# Altium PCB PCB1.PcbDoc (part 7 of 7)
Units mm, origin at the board's own origin, x right, y up, seen from the top; angles counter-clockwise.
Board outline 100 x 70 mm, 6 copper layers (Top Layer 1, GND_1, SIG, VCC, GND_2, Bottom Layer 1), stack 0.816 mm thick; 462 components, 328 nets, 2208 pads, 873 vias.
Unrouted connection lines stored in the file: 175.
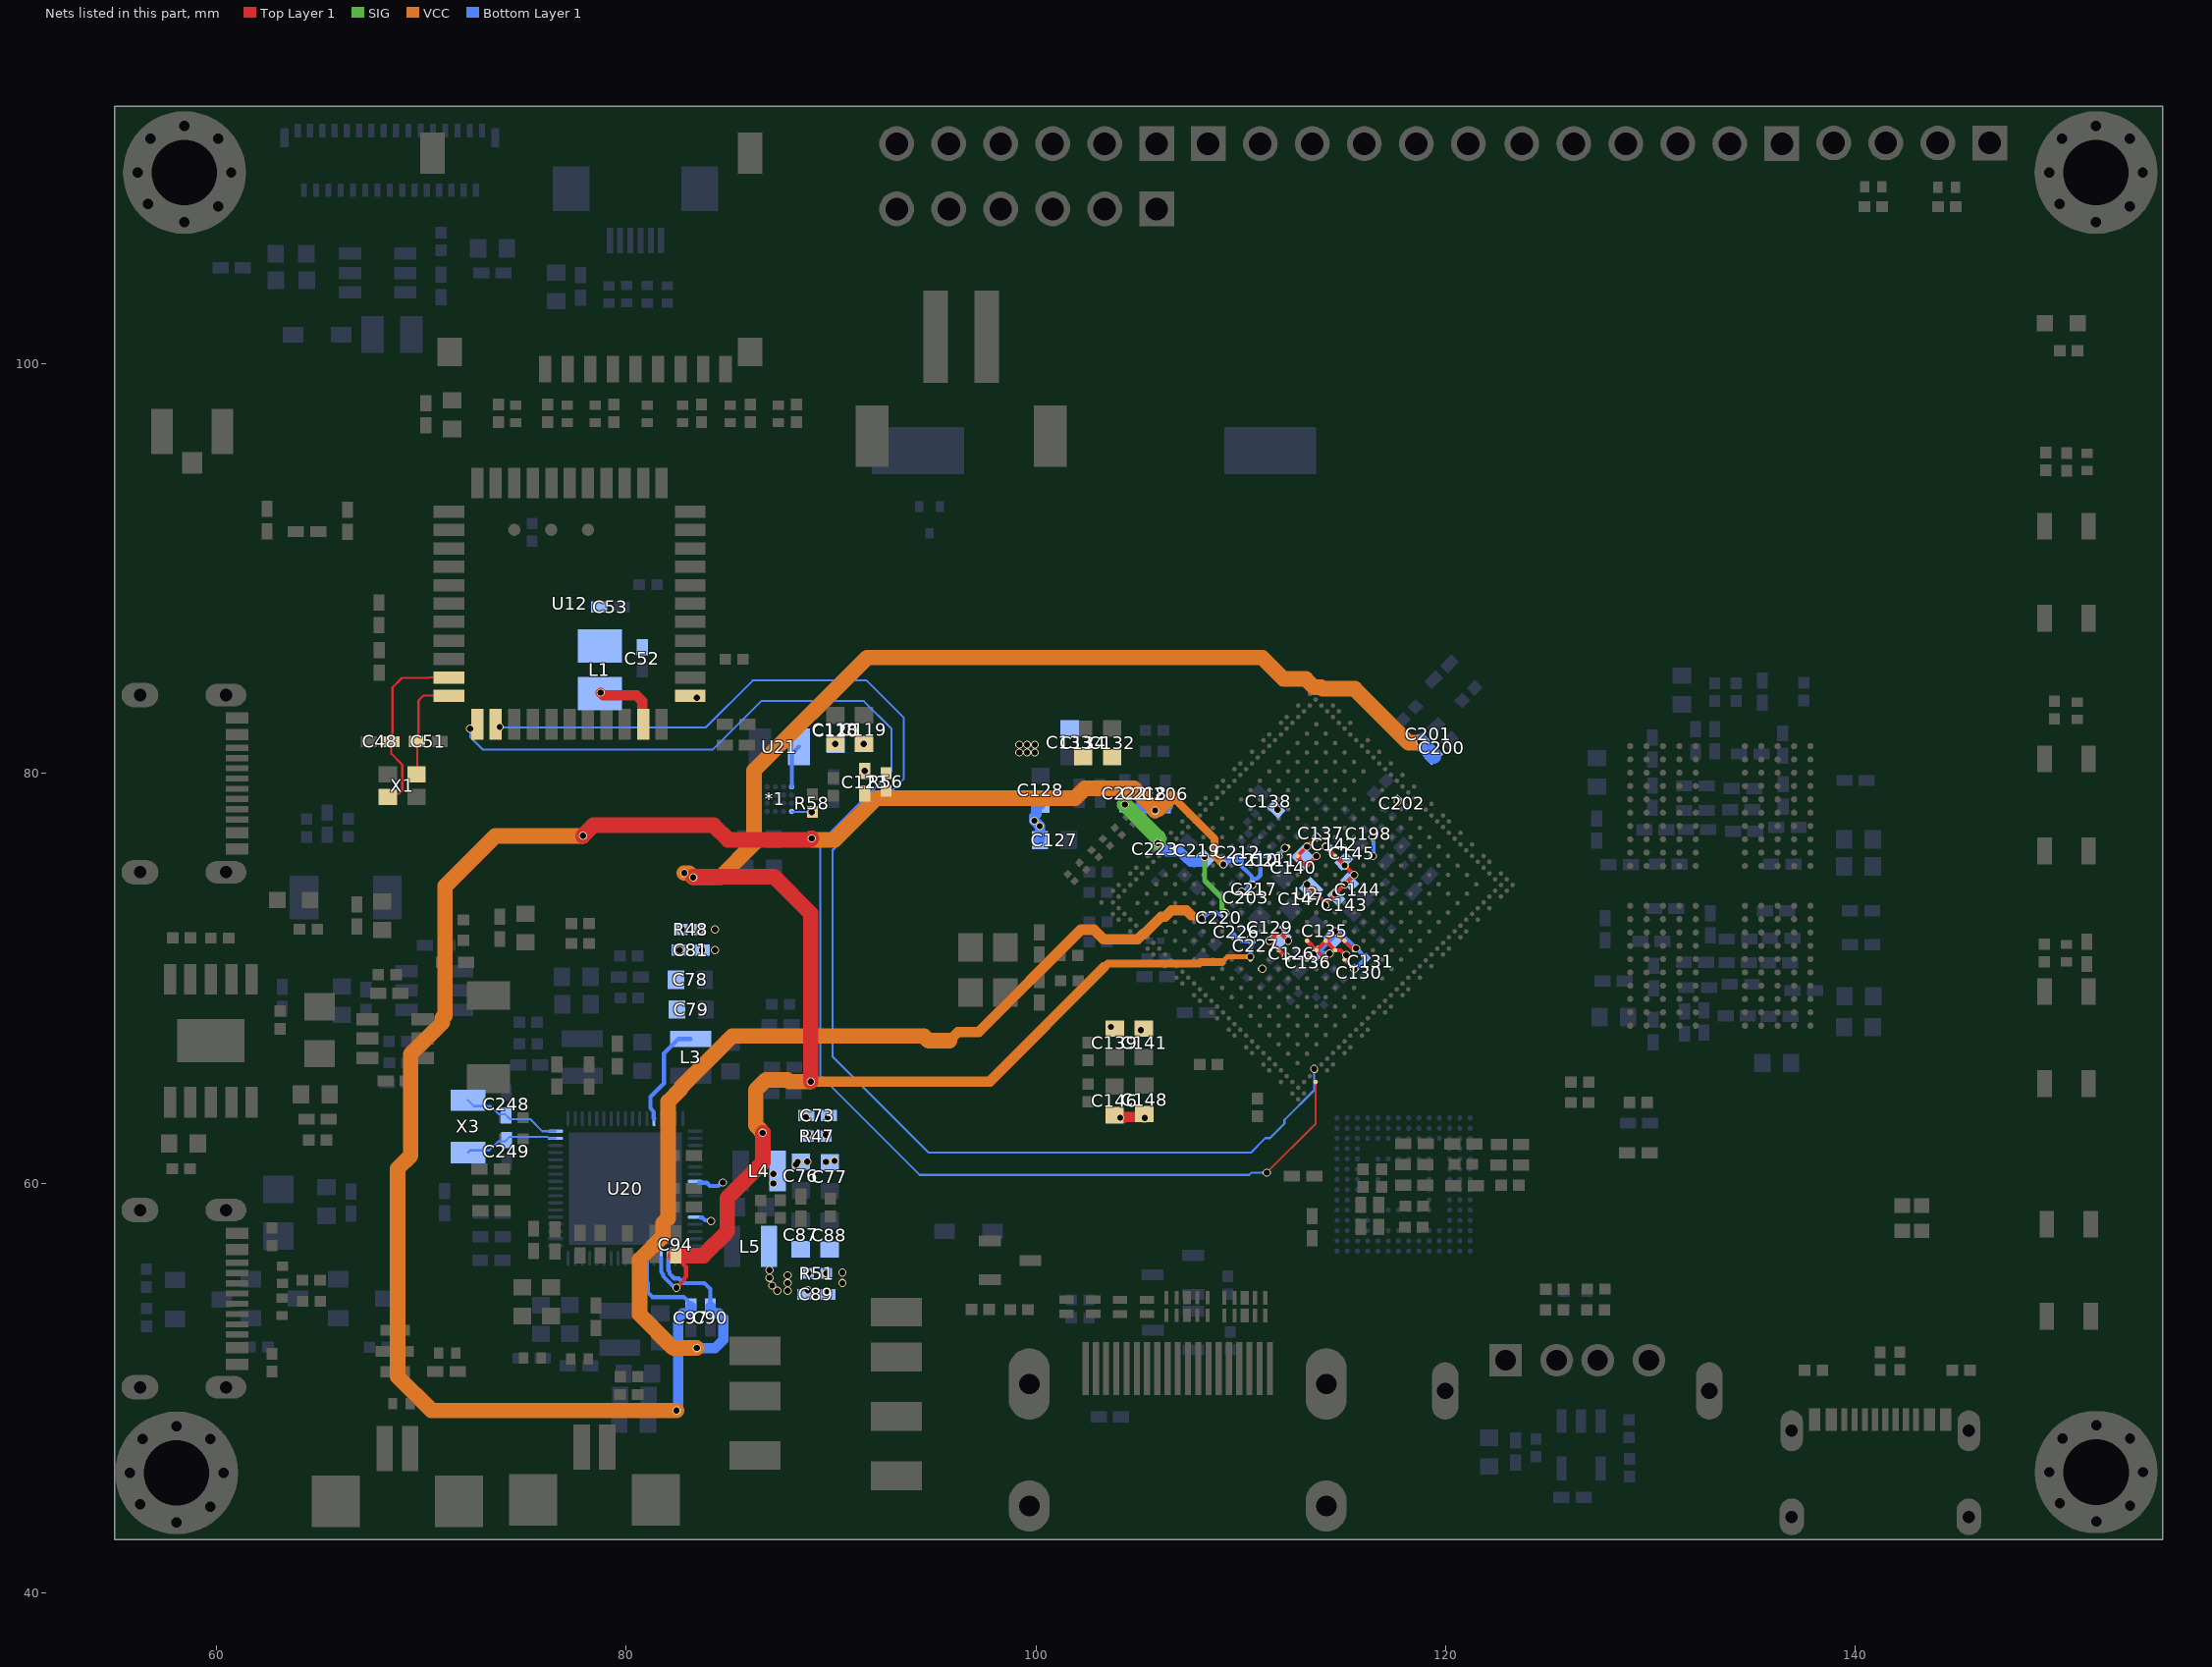
[diagram p11: the nets of this part, all layers, seen from the top]

## Via types
v1: diameter 0.4, hole 0.3, Top Layer 1 to Bottom Layer 1, tented both sides, 873 vias

## Nets (pads, with @x,y where several pads share a name; then routed paths per layer and width w, separated by ;. In a path a pad name is that pad's centre, name@x,y a point inside that pad or via, vN(x,y) a via of type N, cw(c..) or ccw(c..) an arc to the next point about the centre after c; other vN are vias at no path point) (continued)
VDD_CPU: *1.A4 C118.2 C119.2 C120.2 C123.1 C123.2 C130.2 C131.2 C132.2 C133.2 C134.2 C135.2 C136.2 R56.1 R56.2 U2.1C12 U2.1D11 U2.1D12 U2.1E11 U2.1E12 U2.1E13 U2.1F11 U2.1F12 U2.1F13 U2.1F14 U2.1G13 U21.2 | length 14.4
  Top Layer 1 w0.203: U2.1F14@113.24,70.913 113.318,70.991 113.382,70.991 113.556,71.165 v1(113.565,71.165) ; U2.1G13@113.24,71.831 U2.1F13@113.699,71.372 ; v1@113.55,71.158 113.55,71.202 113.603,71.256 113.603,71.276 U2.1F13@113.699,71.372 ; U2.1E13@114.116,70.955 U2.1F13@113.699,71.372 ; U2.1E13@114.155,70.914 114.159,70.917 114.159,70.989 114.342,71.172 v1(114.342,71.212) ; U2.1D11@115.532,71.379 115.529,71.379 115.078,71.83 115.078,71.831 v1(114.619,72.291) U2.1F12@114.159,71.831 ; U2.1D11@115.534,71.379 U2.1D11@115.534,71.373 115.539,71.373 115.626,71.46 v1(115.634,71.46) ; v1(115.538,70.452) v1(115.538,70.452) U2.1D12@115.075,70.914 115.078,70.917 115.078,70.997 115.163,71.082 v1(115.163,71.135) 115.109,71.135 114.875,71.37 114.62,71.37 U2.1F12@114.159,71.831 ; U2.1F13@113.699,71.372 U2.1F12@114.159,71.831
  Bottom Layer 1 w0.203: *1.A4@88.076,79.349 88.076,80.96 U21.2@88.429,81.312 ; v1(113.565,71.165) 113.573,71.157 C136.2@113.683,71.157 ; C136.2@113.726,71.2 C136.2@113.772,71.245 ; v1(114.342,71.212) 114.309,71.245 C136.2@113.772,71.245 ; v1(115.538,70.452) 115.57,70.452 C131.2@116.128,71.009 ; C131.2@116.135,71.009 C131.2@116.128,71.009 ; C136.2@113.772,71.245 114.609,72.082 114.609,72.281 v1(114.619,72.291) 114.656,72.253 114.841,72.253 v1(115.634,71.46) 115.659,71.46 116.11,71.009 C131.2@116.128,71.009
  other v1: 91.638,80.123 99.187,81.026 99.568,81.026 99.949,81.026 99.187,81.407 99.568,81.407 99.949,81.407 90.202,81.447 91.599,81.447
VDD_GPU: C73.1 C73.2 C76.1 C77.1 C137.2 C138.2 C139.2 C140.2 C141.2 L4.1 R47.1 R47.2 U2.1L8 U2.1L9 U2.1M7 U2.1M8 U2.1M9 U20.8 | length 3.9
  Top Layer 1 w0.203: U2.1M9@112.786,75.893 112.786,75.961 U2.1M9@112.777,75.97 113.234,76.428 v1(113.24,76.428) v1(113.699,76.887) ; 112.855,75.893 112.855,75.834 112.85,75.829 113.165,75.513 113.235,75.513 113.24,75.508 v1(113.699,75.968)
  Bottom Layer 1 w0.203: U20.8@83.549,60.015 83.92,60.015 84.074,59.86 84.498,59.86 84.662,60.024 v1(84.715,60.024)
  other v1: 87.179,59.977 87.179,60.442 88.29,60.905 88.368,61.037 88.834,61.044 89.745,61.037 90.17,61.087 89.739,62.368 88.874,62.411 88.771,63.22 89.839,63.22 105.121,67.473 103.668,67.624 111.808,78.231
VDD_LOGIC: C87.2 C88.2 C89.1 C89.2 C142.2 C143.2 C144.2 C145.2 C146.2 C147.2 C148.2 L5.1 R51.1 R51.2 U2.1H7 U2.1H8 U2.1H9 U2.1H10 U2.1J7 U2.1J10 U2.1K7 U2.1K10 U2.1L7 U20.13 | length 7.7
  Top Layer 1 w0.203: U2.1K10@113.236,74.591 v1(113.243,74.584) ; U2.1K10@113.238,74.591 113.238,74.589 113.698,74.129 v1(113.7,74.129) 113.7,74.128 U2.1H10@114.156,73.672 ; v1(114.132,73.561) 114.152,73.582 114.152,73.668 U2.1H10@114.156,73.672 ; v1(114.159,76.428) 114.619,75.968 v1(115.078,75.508) v1(115.538,75.049) v1(115.078,74.589) v1(114.619,74.129) ; U2.1H10@114.235,73.747 114.16,73.672 U2.1H10@114.156,73.672 ; 114.236,73.747 U2.1H9@114.612,74.123 ; U2.1H9@114.612,74.123 v1(114.619,74.129)
  Top Layer 1 w0.508: C146.2@103.839,63.314 103.965,63.188 v1(104.113,63.188) ; C146.2@104.162,63.314 104.289,63.188 104.323,63.222 105.151,63.222 C148.2@105.27,63.341 ; C148.2@105.297,63.368 105.315,63.35 v1(105.315,63.174)
  Bottom Layer 1 w0.203: U20.13@83.628,58.307 83.725,58.307 83.85,58.182 84.098,58.182 v1(84.136,58.144)
  other v1: 89.858,54.679 87.376,54.737 87.884,54.737 88.861,54.763 87.122,54.991 87.884,55.118 90.551,55.118 86.995,55.372 87.884,55.499 88.89,55.588 89.755,55.588 90.551,55.626 86.995,55.753
VDD_NPU: C78.2 C79.2 C81.1 C81.2 C126.2 C127.2 C128.2 C129.2 L3.2 R48.1 R48.2 U2.1G15 U2.1H14 U2.1H15 U2.1J14 U2.1J15 U20.64 | length 9.8
  Top Layer 1 w0.203: v1@112.207,71.05 112.207,71.028 112.317,70.918 U2.1G15@112.317,70.914 ; v1(112.21,71.05) 112.185,71.05 111.861,71.374 111.858,71.374 v1(111.401,71.831) v1(111.861,72.291) v1(112.321,71.831)
  Bottom Layer 1 w0.203: U20.64@81.352,63.141 81.326,63.168 81.326,63.506 81.174,63.658 81.174,64.207 81.839,64.872 81.839,66.335 82.545,67.041 L3.2@83.145,67.041
  Bottom Layer 1 w0.508: C127.2@100.203,76.752 100.19,76.764 v1(100.19,77.432) 99.925,77.697 v1(99.919,77.697) 99.919,77.904 100.031,78.015 100.031,78.34 100.177,78.486 C128.2@100.227,78.486
  other v1: 82.603,71.374 83.693,71.374 84.328,71.374 82.715,72.381 83.581,72.381 84.328,72.39
VDDA0V9_IMAGE: C97.1 C203.2 C206.2 C210.2 C211.2 C212.2 C217.2 C218.2 U2.1H17 U2.1N9 U2.1N10 U2.1N13 U2.1N14 U20.23 | length 100
  Top Layer 1 w0.762: v1(77.883,76.96) 78.393,77.47 84.265,77.47 84.969,76.765 88.982,76.765 v1(89.047,76.83)
  VCC w0.381: 106.672,78.867 108.731,76.809 108.731,75.986 109.151,75.566 v1(109.151,75.561)
  VCC w0.635: v1(105.819,78.193) 105.998,78.193 106.672,78.867
  VCC w0.762: v1(77.883,76.96) 73.606,76.96 71.146,74.5 71.146,68.177 71.018,68.049 71.018,67.843 69.469,66.294 69.469,61.341 68.834,60.706 68.834,50.546 70.49,48.89 v1(82.453,48.89) ; v1(89.047,76.83) 89.112,76.765 90.178,76.765 92.203,78.79 101.904,78.79 102.386,79.271 104.793,79.271 105.819,78.246 v1(105.819,78.193)
  Bottom Layer 1 w0.203: U20.23@81.002,56.327 81.002,55.553 80.999,55.55 80.999,55.171 81.044,55.126 81.044,54.662 81.272,54.434 82.811,54.434 83.155,54.09 C97.1@83.155,53.965 ; C212.2@110.032,75.962 110.047,75.947 110.047,75.476 110.054,75.469 110.054,75.467 110.542,74.979 v1@110.542,74.699 ; v1(110.05,74.226) 110.045,74.221 C203.2@110.045,74.128 110.048,74.128 110.463,74.543 C217.2@110.467,74.543 ; v1(110.573,74.56) 110.484,74.56 C217.2@110.467,74.543 ; C210.2@110.905,75.982 110.889,75.966 110.889,75.88 110.965,75.805 110.965,75.04 110.794,74.869 110.713,74.869 v1@110.542,74.699 ; C210.2@110.906,75.971 111.3,75.971 111.355,76.025 111.523,76.025 111.599,75.949 111.842,75.949 v1(111.861,75.968) 111.861,75.982 111.858,75.985 111.858,76.035 112.16,76.337 v1(112.16,76.36) ; C217.2@110.467,74.543 110.467,74.624 v1@110.542,74.699
  Bottom Layer 1 w0.381: v1(109.151,75.561) 109.156,75.561 109.408,75.814 109.781,75.814 109.836,75.869 109.939,75.869 C212.2@110.032,75.962
  Bottom Layer 1 w0.508: v1(82.453,48.89) 82.529,48.966 82.529,53.417 82.738,53.625 82.941,53.625 83.155,53.84 C97.1@83.155,53.965
  Bottom Layer 1 w0.762: C218.2@105.287,78.475 105.551,78.475 105.559,78.467 105.819,78.467 ; v1(105.819,78.193) 105.819,78.467 ; C206.2@106.32,78.46 106.312,78.467 105.819,78.467
  other v1: 111.052,70.465
VDDA0V9_PMU: C90.1 C219.2 C220.2 C222.2 C223.2 U2.1N16 U2.1P17 U20.20 | length 62.1
  SIG w0.254: v1(108.239,75.917) 108.239,74.768 109.077,73.93 109.077,73.4 109.264,73.213 v1(109.264,73.174)
  SIG w0.762: v1(104.341,78.487) 105.955,76.873 v1(105.955,76.604)
  VCC w0.254: 107.59,73.081 107.73,72.941 108.072,72.941 v1(108.1,72.913)
  VCC w0.508: 95.778,66.95 96.202,67.373 97.202,67.373 102.202,72.374 102.844,72.374 103.305,71.913 104.977,71.913 105.206,72.142 105.256,72.142 106.12,73.006 106.311,73.006 106.63,73.325 107.346,73.325 107.59,73.081
  VCC w0.762: v1(83.439,51.943) 82.296,51.943 80.649,53.59 80.649,56.265 81.788,57.404 81.788,58.032 82.04,58.284 82.04,63.979 82.677,64.616 82.677,64.679 85.181,67.183 94.522,67.183 94.758,66.947 95.775,66.947 95.778,66.95
  Bottom Layer 1 w0.178: v1(108.1,72.913) 108.16,72.913 108.455,73.209 108.815,73.209 108.878,73.146 109.092,73.146 109.12,73.174 v1(109.264,73.174)
  Bottom Layer 1 w0.203: U20.20@82.052,56.327 82.052,55.734 82.11,55.676 82.11,55.572 82.341,55.342 82.562,55.342 82.786,55.118 83.82,55.118 84.105,54.833 C90.1@84.105,53.976
  Bottom Layer 1 w0.508: v1(83.439,51.943) 84.33,51.943 84.73,52.344 84.73,53.428 84.522,53.637 84.319,53.637 84.105,53.851 C90.1@84.105,53.976 ; v1(105.955,76.604) 105.996,76.562 C223.2@105.996,76.507 106.071,76.507 106.379,76.2 107.039,76.2 107.43,75.81 107.451,75.81 107.569,75.692 108.013,75.692
VDDA_0V9: C94.1 C198.1 C200.1 C201.1 C202.2 C226.2 C227.2 U2.1H5 U2.1J4 U2.1J17 U2.1K16 U20.21 | length 103.8
  Top Layer 1 w0.203: v1(82.446,54.887) 82.837,55.278 82.837,55.354 82.914,55.431 82.914,55.91 C94.1@82.659,56.165
  Top Layer 1 w0.762: C94.1@82.408,56.458 82.678,56.458 83.763,56.458 84.929,57.624 84.929,59.273 86.66,61.003 v1(86.66,62.454) ; v1@83.267,74.967 87.2,74.967 89.003,73.163 v1(89.003,64.953)
  VCC w0.254: 109.093,70.785 109.358,71.05 v1(110.473,71.05)
  VCC w0.381: 103.324,70.532 103.517,70.724 107.971,70.724 108.032,70.785 109.093,70.785
  VCC w0.508: v1(89.003,64.953) 97.745,64.953 103.324,70.532
  VCC w0.762: v1(82.828,75.142) 83.055,75.142 v1(83.267,74.93) 84.582,74.93 86.233,76.581 86.233,80.137 91.761,85.665 111.044,85.665 112.089,84.62 113.177,84.62 113.583,84.214 113.916,84.214 113.994,84.137 115.569,84.137 118.204,81.503 118.547,81.503 ; v1(86.66,62.454) 86.545,62.569 86.545,62.605 86.321,62.829 86.321,64.541 86.821,65.041 87.868,65.041 87.956,64.953 v1(89.003,64.953)
  Bottom Layer 1 w0.203: U20.21@81.702,56.327 81.702,55.653 81.806,55.55 81.806,55.446 82.327,54.925 82.409,54.925 v1(82.446,54.887) ; C226.2@109.603,72.077 109.618,72.093 109.704,72.093 109.888,71.909 109.939,71.909 110.048,71.8 110.513,71.8 110.544,71.768 110.544,71.572 110.468,71.496 110.468,71.055 v1(110.473,71.05) ; C227.2@110.483,71.8 110.483,71.929 v1(110.485,71.931) ; v1(116.457,75.968) 116.457,75.982 116.482,76.007 116.482,76.668 116.458,76.692 116.458,76.886 v1(116.457,76.887)
  Bottom Layer 1 w0.254: v1(117.663,78.643) 117.663,78.651 117.676,78.663 C202.2@117.676,78.744
  Bottom Layer 1 w0.762: v1(118.776,81.548) 118.776,81.529 119.427,80.878 C200.1@119.427,80.859
VIN_LDO: C52.2 C53.2 L1.1 U12.23
  other v1: 83.439,83.693
VIN_LDO_OUT: L1.2 U12.21 | length 3.4
  Top Layer 1 w0.508: v1(78.74,83.947) 78.867,83.82 80.493,83.82 80.79,83.522 80.79,82.45 U12.21@80.836,82.404
VSEL_EXTDCDC: *1.A1 R58.2 | length 1
  Bottom Layer 1 w0.102: *1.A1@88.076,78.149 88.096,78.13 89.038,78.13 v1(89.058,78.11)
WIFI_REG_ON_H: U2.A35 U12.12 | length 70.4
  Top Layer 1 w0.102: v1(111.274,60.51) 113.664,62.9 U2.A35@113.664,64.937
  Bottom Layer 1 w0.102: v1(72.374,82.185) 72.374,81.792 73.002,81.164 84.212,81.164 86.587,83.539 91.594,83.539 92.945,82.188 92.945,80.104 89.465,76.623 89.465,65.262 94.325,60.401 110.415,60.401 110.524,60.51 v1(111.274,60.51)
WIFI_WAKE_HOST_H: U2.B34 U12.13 | length 67.3
  Bottom Layer 1 w0.102: v1(73.815,82.275) 73.833,82.257 83.884,82.257 86.171,84.544 91.732,84.544 93.554,82.722 93.554,79.736 90.074,76.256 90.074,66.181 94.765,61.49 110.503,61.49 111.208,62.195 111.432,62.195 112.137,62.9 112.137,63.085 113.588,64.536 v1(113.588,65.58)
WIFI_XTAL_IN: C48.1 U12.10 X1.3 | length 8.9
  Top Layer 1 w0.102: X1.3@68.357,78.861 68.507,79.011 68.9,79.011 69.057,79.168 69.057,80.427 68.525,80.959 C48.1@68.525,81.555 C48.1@68.549,81.579 ; C48.1@68.58,81.724 68.58,84.201 69.049,84.67 70.363,84.67 70.38,84.687 U12.10@71.34,84.687
WIFI_XTAL_OUT: C51.2 U12.11 X1.1 | length 5.1
  Top Layer 1 w0.102: X1.1@69.757,79.961 69.782,79.986 C51.2@69.782,81.57 C51.2@69.819,81.607 ; C51.2@69.85,81.738 69.85,83.566 70.082,83.798 U12.11@71.34,83.798
XIN: C248.1 U20.51 X3.2 | length 4.9
  Bottom Layer 1 w0.102: X3.2@72.267,64.042 72.555,63.754 73.381,63.754 73.769,63.366 74.073,63.366 74.32,63.119 75.311,63.119 75.896,62.534 U20.51@76.545,62.534
XOUT: C249.1 U20.50 X3.1 | length 4.6
  Bottom Layer 1 w0.102: X3.1@72.267,61.492 72.37,61.595 73.309,61.595 73.755,62.041 74.088,62.041 74.309,62.262 76.159,62.262 76.237,62.184 U20.50@76.545,62.184
pads on no net: AUDIO1.7 AUDIO1.8 CN1.14 FPC1.4 FPC1.26 FPC1.28 FPC1.33 U1.A1 U1.A2 U1.A11 U1.A12 U1.AA1 U1.AA12 U1.AB1 U1.AB2 U1.AB11 U1.AB12 U1.B1 U1.B12 U1.G11 U1.K5 U1.K8 U1.N5 U1.N8 U2.1A4 U2.1A15 U2.1A17 U2.1A18 U2.1A19 U2.1B17 U2.1B18 U2.1C2 U2.1C15 U2.1D2 U2.1H3 U2.1H19 U2.1H20 U2.1K19 U2.1K20 U2.1L1 U2.1L2 U2.1M19 U2.1N1 U2.1N2 U2.1N19 U2.1N20 U2.1P2 U2.1P18 U2.1P20 U2.1R1 U2.1R2 U2.1R17 U2.1R18 U2.1T1 U2.1T2 U2.1T18 U2.1T19 U2.1T20 U2.1U1 U2.1U3 U2.1U4 U2.1U8 U2.1U9 U2.1V3 U2.1V8 U2.1V9 U2.1V15 U2.1V16 U2.1V20 U2.AA37 U2.AA38 U2.AB1 U2.AB2 U2.AB37 U2.AB38 U2.AC2 U2.AD1 U2.AE2 U2.AF1 U2.AF2 U2.AG2 U2.AG37 U2.AH2 U2.AJ1 U2.AJ2 U2.AJ38 U2.AK2 U2.AL1 U2.AL2 U2.AM1 U2.AM2 U2.AM37 U2.AN2 U2.AN38 U2.AP1 U2.AP3 U2.AP6 U2.AP7 U2.AP9 U2.AP14 U2.AP15 U2.AP17 U2.AP18 U2.AP26 U2.AP27 U2.AP29 U2.AP30 U2.AR2 U2.AR6 U2.AR7 U2.AR9 U2.AR14 U2.AR15 U2.AR17 U2.AR18 U2.AR26 U2.AR27 U2.AR29 U2.AR30 U2.B38 U2.J37 U2.J38 U2.K37 U2.K38 U2.M37 U2.M38 U2.N37 U2.N38 U2.T37 U2.V37 U2.V38 U2.W37 U2.W38 U2.Y1 U2.Y2 U3.A1 U3.A8 U3.A9 U3.A10 U3.A11 U3.A12 U3.A13 U3.A14 U3.B1 U3.B7 U3.B8 U3.B9 U3.B10 U3.B11 U3.B12 U3.B13 U3.B14 U3.C3 U3.C7 U3.C8 U3.C9 U3.C10 U3.C11 U3.C12 U3.C13 U3.C14 U3.D1 U3.D2 U3.D3 U3.D4 U3.D12 U3.D13 U3.D14 U3.E1 U3.E2 U3.E3 U3.E5 U3.E8 U3.E9 U3.E10 U3.E12 U3.E13 U3.E14 U3.F1 U3.F2 U3.F3 U3.F10 U3.F12 U3.F13 U3.F14 U3.G1 U3.G2 U3.G3 U3.G10 U3.G12 U3.G13 U3.G14 U3.H1 U3.H2 U3.H3 U3.H12 U3.H13 U3.H14 U3.J1 U3.J2 U3.J3 U3.J12 U3.J13 U3.J14 U3.K1 U3.K2 U3.K3 U3.K6 U3.K7 U3.K10 U3.K12 U3.K13 U3.K14 U3.L1 U3.L2 U3.L3 U3.L12 U3.L13 U3.L14 U3.M1 U3.M2 U3.M3 U3.M7 U3.M8 U3.M9 U3.M10 U3.M11 U3.M12 U3.M13 U3.M14 U3.N1 U3.N3 U3.N6 U3.N7 U3.N8 U3.N9 U3.N10 U3.N11 U3.N12 U3.N13 U3.N14 U3.P1 U3.P2 U3.P7 U3.P8 U3.P9 U3.P10 U3.P11 U3.P12 U3.P13 U3.P14 U12.4 U12.5 U12.8 U12.30 U12.32 U12.35 U12.37 U12.38 U12.39 U12.40 U12.45 U12.46 U12.47 U20.42 U20.60 U22.2 U22.3 U22.10 USB1.3 USB1.9 USB3.3 USB3.9 USB4.3 USB4.5 USB4.6 USB4.7 USB4.8 USB4.9

## Polygon pours and split planes (outlines as drawn)
GND on Bottom Layer 1 "GND_L06_P106" (solid, pour order 106): 54.938,112.446 54.938,42.342 155.014,42.342 155.014,112.573
VCC3V3_PMU on Bottom Layer 1 "VCC3V3_PMU_L06_P082" (solid, pour order 82): 103.124,71.247 102.997,71.374 102.997,75.565 103.124,75.692 103.759,75.692 103.886,75.565 103.886,71.374 103.759,71.247
VCC5V0_SYS on Bottom Layer 1 "VCC5V0_SYS_L06_P014" (solid, pour order 14): 67.437,69.088 67.818,68.707 67.818,66.675 67.945,66.548 68.707,66.548 68.834,66.675 68.834,67.31 68.58,67.564 68.58,68.834 68.834,69.088
VDD_NPU on Bottom Layer 1 "VDD_NPU_L06_P027" (solid, pour order 27): 82.178,66.421 82.031,66.568 82.042,66.579 82.042,72.771 82.423,73.152 84.201,73.152 84.709,72.644 84.709,71.12 84.455,70.866 83.185,70.866 83.058,70.739 83.058,67.818 83.185,67.691 84.201,67.691 84.328,67.564 84.328,66.548 84.201,66.421
VCC5V0_USB_OTG on Bottom Layer 1 "VCC5V0_USB_OTG_L06_P056" (solid, pour order 56): 125.443,49.391 125.845,49.391 125.857,49.403 126.071,49.189 126.095,49.189 126.095,47.228 125.984,47.117 123.698,47.117 123.698,46.99 120.904,46.99 120.65,47.244 120.65,48.26 121.158,48.768 124.841,48.768 125.476,49.403
VCC3V3_SYS on Bottom Layer 1 "VCC3V3_SYS_L06_P019" (solid, pour order 19): 64.643,72.009 63.246,72.009 62.992,72.263 62.992,76.327 63.881,77.216 64.897,77.216 65.151,77.47 65.786,77.47 66.04,77.216 66.04,75.946 65.786,75.692 65.405,75.692 65.024,75.311 65.024,72.39
VCC5V0_SYS on Bottom Layer 1 "VCC5V0_SYS_L06_P021" (solid, pour order 21): 69.088,72.644 70.104,73.66 75.057,73.66 76.073,72.644
VCC5V0_SYS on Bottom Layer 1 "VCC5V0_SYS_L06_P013" (solid, pour order 13): 76.073,72.644 75.946,72.771 66.167,72.771 65.278,71.882 65.278,69.215 65.532,68.961 70.231,68.961 70.485,69.215 70.485,69.596 70.231,69.85 67.945,69.85 67.691,70.104 67.691,71.12 68.707,72.136 72.009,72.136 72.771,71.374 72.771,68.834 73.152,68.453 75.819,68.453 76.073,68.707
VIN_LDO on Bottom Layer 1 "VIN_LDO_L06_P076" (solid, pour order 76): 81.326,87.076 82.169,86.233 82.169,84.328 82.423,84.074 83.693,84.074 83.82,83.947 83.82,83.566 83.693,83.439 81.661,83.439 81.28,83.82 81.28,86.614
VIN_LDO on Bottom Layer 1 "VIN_LDO_L06_P075" (solid, pour order 75): 77.879,85.267 77.83,85.217 77.47,85.217 77.089,85.598 77.089,88.646 77.343,88.9 78.994,88.9 79.121,88.773 79.121,87.503 79.375,87.249 81.153,87.249 81.407,86.995 81.407,85.852 81.28,85.725 80.137,85.725 79.629,85.217 77.851,85.217
NetC69_2 on Bottom Layer 1 "NETC69_2_L06_P060" (solid, pour order 60): 69.013,68.816 69.031,68.834 69.977,68.834 70.231,68.58 70.231,66.793 69.714,67.31 69.018,67.31 69.018,67.39 68.715,67.693 68.715,68.743 68.796,68.824 69.035,68.824
NetC69_2 on Bottom Layer 1 "NETC69_2_L06_P015" (solid, pour order 15): 69.018,67.31 68.937,67.23 68.937,64.413 69.088,64.262 69.977,64.262 70.231,64.516 70.231,67.056 69.977,67.31 69.342,67.31
VCC5V0_SYS on Bottom Layer 1 "VCC5V0_SYS_L06_P054" (solid, pour order 54): 67.691,60.706 68.072,60.325 68.072,59.309 67.818,59.055 61.976,59.055 61.722,59.309 61.722,60.452 61.976,60.706 62.357,60.706
VDD_CPU on Bottom Layer 1 "VDD_CPU_L06_P045" (solid, pour order 45): 99.06,82.804 98.806,82.55 98.806,81.026 99.187,80.645 100.33,80.645 101.219,81.534 102.362,81.534 102.616,81.788 102.616,82.423 102.235,82.804
VDD_CPU on Bottom Layer 1 "VDD_CPU_L06_P041" (solid, pour order 41): 87.757,82.423 87.63,82.296 87.63,80.391 87.757,80.264 89.154,80.264 89.662,80.772 90.932,80.772 91.186,80.518 91.186,79.756 91.313,79.629 91.948,79.629 92.329,80.01 92.329,81.915 92.202,82.042 89.535,82.042 89.154,82.423
VCC_1V8 on Bottom Layer 1 "VCC_1V8_L06_P026" (solid, pour order 26): 78.867,66.421 76.581,66.421 76.327,66.675 76.327,70.612 76.581,70.866 77.343,70.866 77.47,70.739 77.47,67.945 77.597,67.818 78.867,67.818 78.994,67.691 78.994,66.548
VCC_DDR on Bottom Layer 1 "VCC_DDR_L06_P025" (solid, pour order 25): 78.486,52.705 78.486,52.07 78.867,51.689 78.867,47.879 79.121,47.625 80.01,47.625 80.391,48.006 80.391,51.562 80.645,51.816 80.772,51.816 80.899,51.943 80.899,52.705
VDD_LOGIC on Bottom Layer 1 "VDD_LOGIC_L06_P024" (solid, pour order 24): 86.487,58.039 86.36,57.912 86.36,54.483 86.614,54.229 90.551,54.229 90.805,54.483 90.805,57.023 90.551,57.277 87.884,57.277 87.503,57.658 87.503,57.912 87.376,58.039
NetC63_1 on Bottom Layer 1 "NETC63_1_L06_P017" (solid, pour order 17): 71.018,72.01 70.875,72.01 70.756,71.891 70.756,70.087 70.866,69.977 72.553,69.977 72.644,70.068 72.644,71.247 71.882,72.009
NetC63_2 on Bottom Layer 1 "NETC63_2_L06_P016" (solid, pour order 16): 70.104,72.009 69.088,72.009 68.707,71.628 68.707,70.104 68.834,69.977 70.358,69.977 70.612,70.231 70.612,71.861 70.464,72.009
MIPI_DSI_VCC_LED+ on Bottom Layer 1 "MIPI_DSI_VCC_LED+" (solid, pour order 3): 64.516,102.108 64.643,101.981 64.643,100.584 64.389,100.33 61.087,100.33 60.851,100.566 60.851,106.952 61.595,107.696 62.992,107.696 63.835,108.539 63.835,110.79 63.754,110.871 63.754,111.76 64.008,112.014 64.643,112.014 64.77,111.887 64.77,110.617 64.516,110.363 64.516,107.823 63.5,106.807 62.23,106.807 61.849,106.426 61.849,102.362 62.103,102.108 63.754,102.108
MIPI_DSI_VCC_LED- on Bottom Layer 1 "MIPI_DSI_VCC_LED-_L06_P002" (solid, pour order 2): 67.279,106.139 67.279,105.053 67.128,104.902 65.278,104.902 65.151,104.775 65.151,103.505 65.024,103.378 63.881,103.378 63.754,103.505 63.754,106.299 64.008,106.553 65.024,106.553 65.215,106.744 65.215,110.553 64.897,110.871 64.897,111.76 65.151,112.014 65.913,112.014 66.04,111.887 66.04,110.363 66.294,110.109 66.294,106.807 66.548,106.553 67.056,106.553 67.279,106.33 67.279,106.134
NetD8_2 on Bottom Layer 1 "NETD8_2_L06_P001" (solid, pour order 1): 68.261,100.627 68.261,100.425 68.109,100.274 65.576,100.274 65.412,100.438 65.412,103.639 65.67,103.898 68.097,103.898 68.28,103.715
VCC5V0_SYS on Bottom Layer 1 "VCC5V0_SYS_L06_P000" (solid, pour order 0): 68.781,103.836 68.654,103.836 68.523,103.706 68.523,100.508 68.726,100.305 70.079,100.305 71.374,101.6 71.374,103.632 71.17,103.836
GND on Top Layer 1 "GND_L01_P114" (solid, pour order 114): 54.991,112.649 54.991,42.545 155.012,42.545 155.012,112.776
VCCIO_FLASH on Top Layer 1 "VCCIO_FLASH_L01_P078" (solid, pour order 78): 122.809,64.135 123.063,63.881 123.063,57.658 122.682,57.277 118.745,57.277 118.491,57.531 118.491,59.309 118.618,59.436 120.904,59.436 121.031,59.563 121.031,61.214 121.158,61.341 121.793,61.341 121.92,61.468 121.92,62.611 121.539,62.992 121.539,63.881 121.793,64.135
VCC3V3_SYS on Top Layer 1 "VCC3V3_SYS_L01_P020" (solid, pour order 20): 66.294,76.2 66.294,73.279 66.548,73.025 68.58,73.025 68.834,72.771 68.834,71.755 68.58,71.501 64.643,71.501 64.516,71.628 64.516,72.644 64.897,73.025 65.278,73.406 65.278,74.422 65.024,74.676 63.5,74.676 63.119,75.057 63.119,76.454 63.246,76.581 65.913,76.581
NetC240_2 on Top Layer 1 "NETC240_2_L01_P009" (solid, pour order 9): 67.508,66.471 66.725,66.471 66.675,66.421 66.675,65.405 67.564,64.516 67.564,63.5 68.072,62.992 70.993,62.992 71.374,63.373 71.374,64.008 71.628,64.262 75.184,64.262 75.565,64.643 75.565,65.786 75.184,66.167 71.374,66.167 70.612,65.405 70.612,64.135 70.485,64.008 68.961,64.008 68.707,64.262 68.707,66.079 68.315,66.471
NetC246_2 on Top Layer 1 "NETC246_2_L01_P059" (solid, pour order 59): 66.802,67.564 68.072,67.564 68.326,67.818 68.326,70.612 68.199,70.739 66.675,70.739 66.421,70.485 66.421,67.945
VCC5V0_USB_HOST on Top Layer 1 "VCC5V0_USB_HOST_L01_P058" (solid, pour order 58): 121.793,52.705 121.539,52.451 121.539,49.403 122.301,48.641 122.301,46.228 123.19,45.339 143.383,45.339 143.891,45.847 143.891,49.276 143.764,49.403 143.383,49.403 143.256,49.276 143.256,46.863 142.875,46.482 139.446,46.482 139.192,46.736 139.192,49.149 139.065,49.276 138.557,49.276 138.43,49.149 138.43,47.747 138.684,47.493 138.684,46.482 138.557,46.355 126.492,46.355 124.079,48.768 124.079,52.197 123.571,52.705
VCC5V0_USB_OTG on Top Layer 1 "VCC5V0_USB_OTG_L01_P055" (solid, pour order 55): 62.103,52.197 61.976,52.324 58.928,52.324 58.674,52.578 58.674,56.134 58.928,56.388 61.595,56.388 61.722,56.515 61.722,57.023 61.595,57.15 60.475,57.15 60.221,56.896 59.182,56.896 58.42,57.658 56.388,57.658 56.007,57.277 56.007,55.499 56.261,55.245 57.15,55.245 57.277,55.118 57.277,52.07 57.658,51.689 59.475,51.689 59.638,51.852 60.289,51.852 60.452,51.689 61.976,51.689 62.103,51.816
VDD_CPU on Top Layer 1 "VDD_CPU_L01_P046" (solid, pour order 46): 89.281,81.788 89.281,80.645 89.408,80.518 98.806,80.518 98.806,82.042 89.535,82.042 98.806,82.042 89.535,82.042
VDD_CPU on Top Layer 1 "VDD_CPU_L01_P044" (solid, pour order 44): 104.394,80.391 104.394,81.407 104.267,81.534 100.838,81.534 100.076,82.296 99.06,82.296 98.806,82.042 98.806,80.518 99.06,80.264 104.267,80.264
VDD_CPU on Top Layer 1 "VDD_CPU_L01_P042" (solid, pour order 42): 93.345,80.645 93.345,78.74 93.218,78.613 91.313,78.613 91.186,78.74 91.186,80.645
VCC5V0_SYS on Top Layer 1 "VCC5V0_SYS_L01_P010" (solid, pour order 10): 72.136,68.199 71.628,68.707 71.628,72.009 72.009,72.39 75.819,72.39 76.2,72.009 76.2,68.58 75.819,68.199 73.533,68.199
VCC12V_DCIN on Top Layer 1 "VCC12V_DCIN_L01_P008" (solid, pour order 8): 64.262,67.183 64.135,67.056 64.135,65.532 64.262,65.405 64.643,65.405 64.897,65.151 64.897,63.373 65.024,63.246 65.024,60.833 65.278,60.579 66.929,60.579 67.183,60.833 67.183,64.643 66.421,65.405 66.04,65.786 66.04,67.056 65.913,67.183
+12 on Top Layer 1 "+12_L01_P007" (solid, pour order 7): 62.484,67.41 62.484,61.595 61.976,61.087 58.547,61.087 58.293,60.833 58.293,60.452 58.547,60.198 62.738,60.198 63.373,60.833 63.373,67.249 63.086,67.536
+12 on Top Layer 1 "+12_L01_P004" (solid, pour order 4): 61.976,82.169 61.849,82.296 60.45,82.296 60.154,82.001 57.998,82.001 57.277,81.28 57.277,73.66 57.912,73.025 59.817,73.025 60.198,72.644 60.198,71.247 60.452,70.993 61.976,70.993 62.103,70.866 62.103,67.437 62.611,66.929 63.373,66.929 64.135,67.691 65.786,67.691 66.04,67.945 66.04,69.215 65.786,69.469 64.268,69.469 64.135,69.336 64.135,68.58 64.008,68.453 63.373,67.818 62.992,67.818 62.738,68.072 62.738,72.644 61.468,73.914 61.214,74.168 59.182,74.168 58.801,74.549 58.801,80.391 59.944,81.534 61.849,81.534 61.976,81.661
+12 on Top Layer 1 "+12_L01_P005" (solid, pour order 5): 61.976,77.343 61.849,77.47 59.944,77.47 59.309,78.105 58.801,78.105 58.42,77.724 58.42,77.089 58.801,76.708 61.849,76.708 61.976,76.835
GND on VCC "GND_L04_P101" (solid, pour order 101): 54.991,112.649 54.991,42.545 155.012,42.545 155.012,112.776
VCCIO_FLASH on VCC "VCCIO_FLASH_L04_P079" (solid, pour order 79): 118.11,66.04 115.443,63.373 115.443,58.039 115.951,57.531 117.094,57.531 123.19,57.531 130.81,65.151 130.81,65.659 130.429,66.04
VCCA1V8_PMU on VCC "VCCA1V8_PMU_L04_P072" (solid, pour order 72): 84.582,61.849 84.836,61.595 84.836,61.404 84.328,60.896 84.328,59.309 83.82,58.801 83.82,54.737 84.328,54.229 90.805,54.229 92.583,56.007 99.187,56.007 100.584,57.404 123.19,57.404 130.937,65.151 138.938,65.151 139.954,66.167 139.954,82.804 138.779,83.979 137.001,83.979 136.144,84.836 136.144,85.979 136.779,86.614 141.351,86.614 142.748,85.217 142.748,64.135 141.097,62.484 135.001,62.484 127.889,55.372 102.235,55.372 101.346,54.483 94.107,54.483 91.821,52.197 82.931,52.197 81.915,53.213 81.915,60.96 82.804,61.849
VDD_LOGIC on VCC "VDD_LOGIC_L04_P053" (solid, pour order 53): 90.805,58.547 97.79,58.547 102.489,63.246 112.649,63.246 122.555,73.152 122.555,74.93 116.078,81.407 114.046,81.407 111.379,78.74 111.379,78.288 113.699,75.968 114.195,75.968 115.443,77.216 116.459,77.216 119.38,74.295 119.38,73.375 117.376,71.372 115.572,71.372 109.158,77.786 109.158,79.44 113.157,83.439 118.745,83.439 124.968,77.216 124.968,72.136 110.363,57.531 100.711,57.531 99.187,56.007 92.456,56.007 90.805,54.356
VCC_DDR on VCC "VCC_DDR_L04_P070" (solid, pour order 70): 136.144,85.344 137.668,83.82 138.684,83.82 139.827,82.677 139.827,66.04 139.065,65.278 123.327,65.278 122.555,66.05 122.555,79.883 118.872,83.566 117.729,83.566 116.84,84.455 116.84,85.09 117.094,85.344
VDD_GPU on VCC "VDD_GPU_L04_P052" (solid, pour order 52): 90.487,63.373 97.79,63.373 103.124,68.707 114.935,68.707 119.38,73.152 119.38,74.295 116.328,77.347 115.574,77.347 114.195,75.968 113.699,75.968 111.379,78.288 111.379,78.867 113.919,81.407 116.078,81.407 122.555,74.93 122.555,73.152 112.776,63.373 104.013,63.373 99.187,58.547 90.487,58.547
VCC_DDR on VCC "VCC_DDR_L04_P073" (solid, pour order 73): 81.233,52.967 81.233,52.625 82.169,51.689 87.083,51.745 91.32,51.696 93.875,54.251 100.987,54.251 102.108,55.372 127.889,55.372 134.874,62.357 140.97,62.357 142.875,64.262 142.875,85.344 141.478,86.741 137.414,86.741 135.509,84.836 121.158,84.836 120.65,84.328 120.396,84.582 116.713,84.582 114.173,87.122 114.173,90.043 115.062,90.932 144.907,90.932 147.193,88.646 147.193,60.96 145.288,59.055 140.843,59.055 134.112,52.324 99.06,52.324 96.139,49.403 81.28,49.403 80.645,50.038
VDD_CPU on VCC "VDD_CPU_L04_P047" (solid, pour order 47): 91.948,85.217 87.249,80.518 87.249,79.756 87.63,79.375 106.553,79.375 113.03,72.898 113.03,72.263 112.903,72.136 112.903,71.247 114.808,69.342 115.443,69.342 116.586,70.485 101.854,85.217
VDD_NPU on VCC "VDD_NPU_L04_P036" (solid, pour order 36): 94.996,69.342 98.806,73.152 108.082,73.152 109.733,71.501 111.633,71.501 112.522,72.39 112.522,73.152 106.68,78.994 86.868,78.994 82.042,74.168 81.026,74.168 78.486,71.628 78.486,70.104 79.248,69.342
VCCA1V8_PMU on VCC "VCCA1V8_PMU_L04_P074" (solid, pour order 74): 81.788,61.295 83.988,66.929 97.155,66.929 101.981,71.755 105.791,71.755 106.895,72.859 108.535,72.859 108.839,72.555 108.839,71.628 107.823,70.612 102.87,70.612 97.536,65.278 89.647,65.278 85.866,61.295
VDD_GPU on VCC "VDD_GPU_L04_P022" (solid, pour order 22): 84.709,61.214 84.455,60.96 84.455,59.563 84.963,59.055 90.424,59.055 90.678,59.309 90.678,63.373 90.424,63.627 88.392,63.627 86.487,61.722 85.258,61.722
VCC_DDR on VCC "VCC_DDR_L04_P034" (solid, pour order 34): 79.629,55.499 77.724,53.594 77.724,50.038 78.359,49.403 81.28,49.403 81.534,49.657 81.534,54.991 81.026,55.499
VDD_LOGIC on VCC "VDD_LOGIC_L04_P023" (solid, pour order 23): 83.82,54.991 84.455,54.356 90.805,54.356 90.805,58.547 90.424,58.928 84.201,58.928 83.82,58.547
VDD_CPU on VCC "VDD_CPU_L04_P061" (solid, pour order 61): 100.838,85.217 110.871,85.217 112.014,84.074 112.014,82.296 109.22,79.502 109.22,76.835
VDD_LOGIC on VCC "VDD_LOGIC_L04_P113" (solid, pour order 113): 115.443,63.033 115.443,59.056 114.68,58.293 112.395,58.293 111.633,57.531 109.767,57.531
VDD_LOGIC on VCC "VDD_LOGIC_L04_P112" (solid, pour order 112): 122.555,70.179 122.555,66.05 122.477,65.972 122.409,66.04 118.282,66.04
NetC63_2 on VCC "NETC63_2_L04_P018" (solid, pour order 18): 70.358,70.231 68.58,70.231 67.818,70.993 67.818,74.93 68.072,75.184 70.231,75.184 70.612,74.803 70.612,70.485
VCC5V0_USB_OTG on VCC "VCC5V0_USB_OTG_L04_P057" (solid, pour order 57): 56.388,57.531 58.293,57.531 59.69,56.134 62.23,56.134 62.23,56.08 70.304,48.006 120.622,48.006 121.511,48.895 122.936,48.895 123.644,48.187 123.644,46.809 122.809,45.974 66.802,45.974 57.404,55.372 56.261,55.372 55.88,55.753 55.88,57.023
VCC12V_DCIN on VCC "VCC12V_DCIN_L04_P012" (solid, pour order 12): 65.405,60.452 65.151,60.706 65.151,67.31 65.532,67.691 68.072,67.691 68.453,67.31 68.453,60.706 68.199,60.452
GND on SIG "GND_L03_P103" (solid, pour order 103): 54.991,112.649 54.991,42.545 155.012,42.545 155.012,112.776
VDDA0V9_IMAGE on SIG "VDDA0V9_IMAGE_L03_P081" (solid, pour order 81): 108.479,77.032 111.514,77.032 111.875,76.671 111.875,70.727 111.425,70.277 110.82,70.277 108.109,72.988 108.109,76.683 108.49,77.064 108.617,77.064
VCC_DDR on SIG "VCC_DDR_L03_P065" (solid, pour order 65): 116.006,73.459 116.45,74.616 116.72,74.556 117.63,74.556 117.825,74.361 117.825,73.135 116.752,72.062 115.009,72.062 112.141,74.93 112.141,78.359 114.681,80.899 114.681,84.328 115.443,85.09 119.888,85.09 120.142,84.836 120.142,84.328 119.634,83.82 116.84,83.82 115.697,82.677 115.697,77.23 117.022,75.905
VCC_DDR on SIG "VCC_DDR_L03_P110" (solid, pour order 110): 121.582,83.706 121.426,83.551 121.426,83.298 121.398,83.298 119.382,81.282 119.255,81.282 119.255,81.641 118.92,81.976 118.616,81.976 117.348,80.708 117.348,78.968 116.315,78.968 115.807,78.46 115.697,78.57 115.697,82.677 116.84,83.82 119.634,83.82 119.761,83.693
VDDA_0V9 on SIG "VDDA_0V9_L03_P085" (solid, pour order 85): 118.994,81.899 118.917,81.976 118.616,81.976 117.348,80.708 117.348,78.968 116.315,78.968 115.797,78.45 115.797,77.534 116.225,77.105 116.225,76.797 116.417,76.606 116.692,76.606 116.8,76.713 116.8,77.483 117.04,77.483 118.207,78.65 118.381,78.824 118.381,79.983 119.255,80.857 119.255,81.641 118.974,81.923
VCC_DDR on SIG "VCC_DDR_L03_P111" (solid, pour order 111): 116.678,75.515 116.979,75.816 116.979,75.825 117.024,75.825 118.165,74.683 118.165,73.719 117.966,73.52 117.932,73.553 117.545,73.553 117.545,73.963 117.256,74.251 116.192,74.251 116.181,74.24
VCC_DDR on SIG "VCC_DDR_L03_P069" (solid, pour order 69): 119.888,85.09 121.285,85.09 121.666,84.709 121.666,83.693 119.761,83.693 119.634,83.82
GND on GND_1 "GND_L02_P102" (solid, pour order 102): 54.991,112.649 54.991,42.545 155.067,42.545 155.067,112.776
GND on GND_2 "GND_L05_P105" (solid, pour order 105): 54.991,112.649 54.991,42.545 155.067,42.545 155.067,112.776

## Other copper
Top Layer 1:
  pour cut-out: 101.066,74.649 105.79,79.374 105.993,79.374 105.708,79.659 94.742,79.659 94.742,79.627 90.525,75.41 90.525,63.219 95.859,57.885 103.606,57.885 105.892,55.599 105.892,54.837 111.276,54.837 111.353,54.914 111.353,58.139 107.797,61.695 100.619,61.695 95.182,67.133 95.224,67.175 95.224,74.522 95.986,75.284 100.947,75.284 101.066,75.165
  pour cut-out: 122.715,73.988 122.715,73.234 122.822,73.127 126.288,73.127 126.288,73.454 125.754,73.988 124.026,73.988
  pour cut-out: 124.591,81.132 123.301,79.843 123.023,79.843 122.428,79.248 122.428,77.283 122.469,77.241 123.228,77.241 123.142,77.155 123.142,76.775 123.15,76.775 123.401,76.524 124.523,77.646 124.523,80.548 124.591,80.615
  pour cut-out: 115.189,63.881 114.477,63.169 114.477,56.465 114.861,56.081 121.079,56.081 121.507,56.51 121.507,63.345 121.083,63.769 116.138,63.769 115.984,63.923
  pour cut-out: 128.771,81.527 129.228,81.984 137.827,81.984 138.557,81.255 138.426,81.123 138.426,67.367 137.552,66.493 128.579,66.493 128.511,66.561
  pour cut-out: 113.66,83.606 113.66,83.601 104.027,73.968 111.938,66.057 111.997,66.057 111.997,65.538 121.539,75.079 121.539,75.184
  pour cut-out: 104.338,73.877 104.338,73.337 104.822,72.853 104.822,72.704 104.558,72.44 103.077,72.44 102.669,72.847 102.669,73.167 102.675,73.172 102.592,73.255 102.339,73.255 102.273,73.189 102.262,73.199 101.646,73.199 101.321,73.525 101.321,73.816 101.866,74.361 102.449,74.361 102.994,73.816 104.151,73.816 104.228,73.893 104.228,73.904
  pour cut-out: 96.012,73.279 95.504,72.771 95.504,68.461 96.011,67.954 98.799,67.954 98.807,67.945 98.816,67.954 99.831,67.954 100.164,68.287 100.164,72.937 99.822,73.279
GND_1:
  pour cut-out: 64.389,92.456 64.135,92.202 64.135,91.313 64.389,91.059 72.263,91.059 72.517,91.313 72.517,92.329 72.263,92.329 72.009,92.583 71.882,92.456
  pour cut-out: 58.166,95.885 58.166,94.488 58.42,94.234 58.42,93.218 59.055,92.583 59.055,92.202 59.563,91.694 60.452,91.694 60.833,91.313 62.738,91.313 62.865,91.186 64.516,91.186 64.643,91.313 64.643,92.202 64.389,92.456 60.325,92.456 59.817,92.964 59.817,93.345 59.436,93.726 59.436,94.615 59.563,94.742 59.563,95.758 59.436,95.885
SIG:
  pour cut-out: 141.097,58.42 141.396,58.121 137.877,54.602 112.886,54.602 112.886,55.101 112.903,55.118 137.795,55.118 137.846,55.169
  pour cut-out: 106.253,79.79 102.963,79.79 99.949,82.804 99.949,96.923 97.284,99.588 69.958,99.588 66.757,102.788 66.757,108.63 66.664,108.723 67.806,109.865 70.777,109.865 70.837,109.804 72.031,110.998 72.644,110.998 73.115,110.527 73.115,106.485 74.317,105.283 103.505,105.283 105.758,103.03 105.758,85.263 106.38,85.263 106.934,84.709 106.934,80.471
  pour cut-out: 86.995,98.044 86.868,97.917 86.868,97.663 86.487,97.663 85.264,96.44 85.264,96.186 85.287,96.209 94.291,96.209 94.291,96.391 94.615,96.715 94.615,97.536 94.212,97.939
  pour cut-out: 77.746,97.939 77.47,97.663 77.47,96.901 77.724,96.647 78.944,96.647 79.371,97.074 79.802,97.074 80.01,97.282 80.874,97.282 80.876,97.28 81.078,97.482 81.078,97.865 81.026,97.917
  pour cut-out: 115.189,63.881 114.477,63.169 114.477,56.465 114.861,56.081 121.079,56.081 121.507,56.51 121.507,63.345 121.083,63.769 116.138,63.769 115.984,63.923
  pour cut-out: 128.795,81.898 128.864,81.968 137.844,81.968 138.574,81.238 138.442,81.107 138.442,67.35 137.569,66.477 128.595,66.477 125.857,69.215 125.857,80.54 127.479,82.161
VCC:
  pour cut-out: 107.543,74.013 106.441,75.115 106.441,75.216 106.181,75.216 105.736,74.77 105.736,74.675 105.349,74.675 104.512,73.838 104.215,73.838 104.078,73.7 104.078,73.17 104.162,73.085 105.641,73.085 106.409,73.854 107.408,73.854 107.452,73.898
Bottom Layer 1:
  pour cut-out: 71.755,87.503 71.755,86.995 72.482,86.995 72.848,86.63 72.848,82.092 72.916,82.024 73.469,82.024 73.279,82.215 73.279,87.122 72.898,87.503
  pour cut-out: 102.45,58.367 102.45,57.93 102.46,57.92 111.1,57.92 112.917,59.737 112.917,62.716 112.63,62.716 112.437,62.523 112.437,59.889 110.915,58.367
  pour cut-out: 120.142,96.539 120.669,96.012 121.294,96.012 121.79,96.509 121.92,96.379 121.92,95.504 122.171,95.504 123.105,94.57 123.105,93.948 123.62,93.434 123.62,90.219 123.239,90.219 122.253,89.233 120.142,89.233
  pour cut-out: 120.206,75.501 119.825,75.501 119.825,75.931 119.761,75.994 120.145,76.378 122.424,76.378 122.75,76.052 126.598,76.052 126.619,76.073 126.619,75.057 123.063,75.057 122.167,75.953 120.53,75.953 120.314,75.737 120.314,75.61
  pour cut-out: 124.574,78.239 124.574,76.848 124.587,76.835 125.687,77.935 126.023,77.935 126.189,77.769 125.073,76.653 125.073,76.482 125.327,76.482 125.346,76.5 125.553,76.293 126.141,76.293 126.141,76.526 126.682,77.068 126.682,78.549 126.297,78.935 126.297,79.629 126,79.629 125.955,79.674 125.359,79.078 125.359,78.174 125.112,77.927 125.112,78.15 124.938,78.323
  pour cut-out: 120.78,76.788 120.78,76.746 120.934,76.593 121.644,76.593 121.871,76.819 122.65,76.819 122.858,77.027 122.858,77.441 122.642,77.657 122.642,78.264 124.65,80.272 124.65,80.835 124.341,80.835 124.277,80.899 124.277,80.702 120.845,77.27 120.845,77.028
  pour cut-out: 118.755,71.831 118.296,71.372 118.714,70.953 121.175,70.953 122.385,69.744 123.536,69.744 123.557,69.723 127.889,69.723 127.889,71.891 127.381,72.399 127.381,73.66 127.146,73.66 127.028,73.778 125.322,73.778 124.515,72.971 119.895,72.971
  pour cut-out: 71.501,64.516 71.501,60.96 73.66,60.96 73.787,61.087 73.787,64.389 73.66,64.516
  pour cut-out: 115.189,63.881 114.477,63.169 114.477,56.465 114.861,56.081 121.079,56.081 121.507,56.51 121.507,63.345 121.083,63.769 116.138,63.769 115.984,63.923
  pour cut-out: 81.675,103.496 82.4,103.496 82.469,103.427 82.469,100.746 82.424,100.746 82.392,100.715 81.675,101.432
  pour cut-out: 95.123,63.01 95.123,62.776 95.669,62.23 109.982,62.23 112.516,64.764 112.516,64.954 112.25,65.22 111.801,65.22 110.157,63.576 110.107,63.627 95.74,63.627
  pour cut-out: 128.778,81.915 128.847,81.984 137.827,81.984 138.557,81.255 138.426,81.123 138.426,67.367 137.552,66.493 128.579,66.493 127.928,67.144 127.928,81.827 128.143,82.042

## Silkscreen, mask and mechanical layers (free items; w line width, h text height)
Top Overlay:
  drawing of 19 lines, arcs and shapes, not listed
  text "TX3" at 133.374,107.75 h1.2 r25
  text "RX3" at 135.626,107.725 h1.2 r25
  text "CLK" at 123.199,107.685 h1.2 r25
  text "CS0" at 130.76,107.705 h1.2 r25
  text "SCL3" at 113.234,107.462 h1.2 r25
  text "MOSI" at 125.471,107.47 h1.2 r25
  text "MISO" at 128.011,107.451 h1.2 r25
  text "SDA3" at 115.438,107.414 h1.2 r25
  text "IO3_A3" at 107.685,107.107 h1.2 r25
  text "IO3_A2" at 110.635,107.11 h1.2 r25
  text "PWM14" at 117.547,107.029 h1.2 r25
  text "PWM15" at 119.673,107.026 h1.2 r25
  text "5V" at 146.286,105.576 h1.2 r25
  text "TX" at 143.719,105.544 h1.2 r25
  text "RX" at 141.66,105.521 h1.2 r25
  text "GND" at 138.873,105.157 h1.2 r25
  text "IO1_A4" at 105.084,104.145 h1.2 r25
  text "3V3" at 92.221,103.964 h1.2 r25
  text "3V3" at 94.939,103.964 h1.2 r25
  text "5V" at 97.733,103.964 h1.2 r25
  text "SCL2" at 99.81,103.964 h1.2 r25
  text "SDA2" at 102.392,103.964 h1.2 r25
  text "all" at 102.505,102.309 h1.2 r25
  text "GND" at 105.497,102.31 h1.2 r25
  text "IO3_A1" at 141.812,101.147 h2
  text "5V" at 99.668,100.888 h1.2
  text "5V FAN" at 84.203,94.646 h2
  text "RK3566" at 107.049,89.99 h2
  text "REC" at 143.536,89.606 h2
  text "Author: myry" at 107.034,88.489 h2
  text "2025.12" at 107.034,86.611 h2
  text "PD 12V" at 59.036,84.907 h2
  text "RST" at 143.536,78.14 h2
  text "PWR" at 62.747,76.024 h2
  text "PWR" at 143.536,66.749 h2
  text "OTG 5V" at 62.261,58.982 h2
  text "MSK" at 143.536,55.165 h2
  text "MIC" at 64.211,48.406 h0.8
  text "SPK" at 73.686,48.406 h0.8
  text "N" at 75.168,47.189 h0.8
  text "P" at 81.189,47.116 h0.8
Mechanical 1:
  the board outline again, w0.254